# EAGLE board ControlDeck (EAGLE 9.6.2)
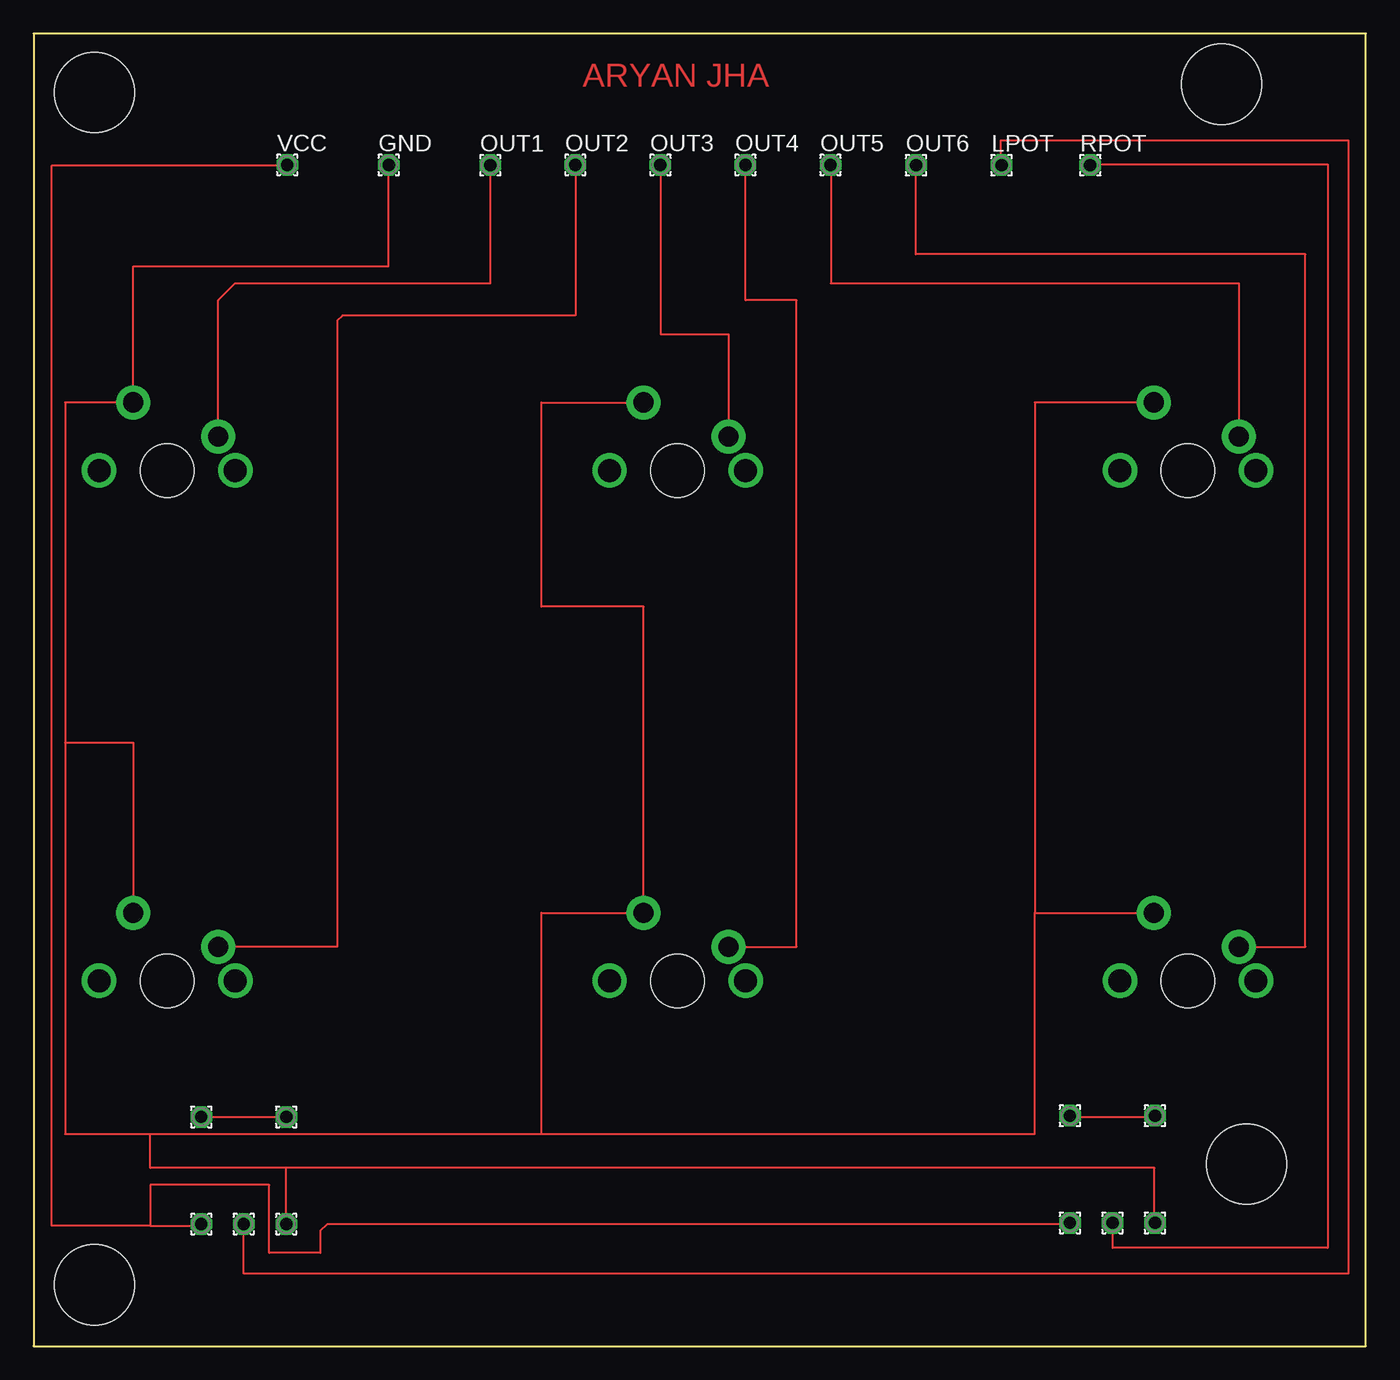
[diagram p0: board, top side]
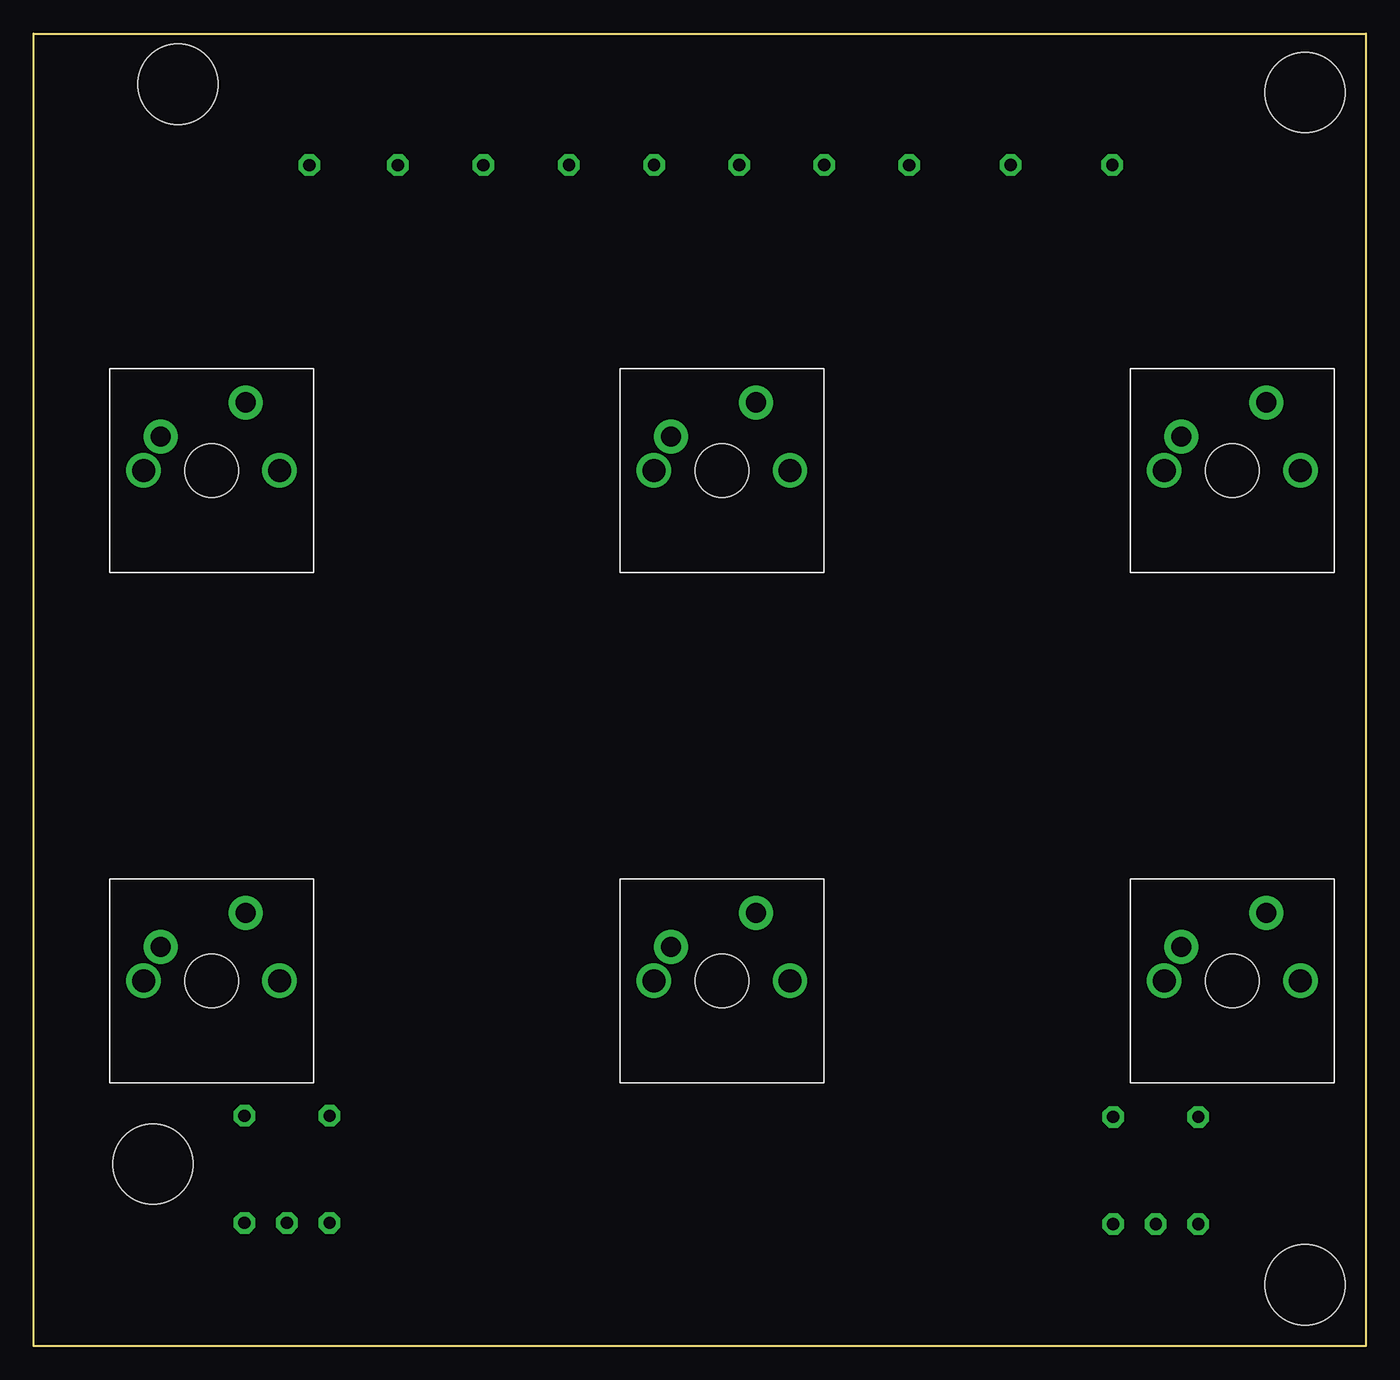
[diagram p1: board, bottom side, seen from below]

Size 99.48 x 98 mm. Coordinates in mm from the lower left corner, seen from the top.
Outline: 0,98 0,0 99.48,0 99.48,98 0,98
Copper layers (1*16): Top 0.035mm / dielectric 1.5mm / Bottom 0.035mm
Design rules "default": minimum track width 6mil, minimum drill 0.35mm, track to track 6mil, track to pad 6mil, pad to pad 6mil, via to via 6mil, smd to smd 6mil, copper to edge 40mil, drill to drill 6mil, minimum pad ring 10mil, minimum via ring 8mil, stop-mask expansion 4mil, vias tented up to drill 0mil, thermal gap 10mil
Holes 6 mm at 88.69,94.21 4.55,93.59 4.55,4.59 90.55,13.59

## Footprints (pad centres in the part's own frame; a part is rotated, then mirrored left to right if it is on the bottom)
CHERRY-MX = drill 1.714 pad 1.93: P$3 -5.08,0; P$4 5.08,0 | drill 1.5 pad 2.54: SW1 -3.81,2.54; SW2 2.54,5.08 | hole 4: 0,0
1,6/0,9 = drill 0.914 pad 1.6 octagon: 1 0,0

## Placement (x,y rotation side)
E$1  [CHERRY-MX]  9.98,65.38 0 bottom
E$2  [CHERRY-MX]  48.08,65.38 0 bottom
E$3  [CHERRY-MX]  86.18,65.38 0 bottom
E$4  [CHERRY-MX]  9.98,27.28 0 bottom
E$5  [CHERRY-MX]  48.08,27.28 0 bottom
E$6  [CHERRY-MX]  86.18,27.28 0 bottom
E$7  [1,6/0,9]  77.38,17.21 0 top
E$8  [1,6/0,9]  83.72,17.21 0 top
E$9  [1,6/0,9]  83.72,9.21 0 top
E$10  [1,6/0,9]  80.55,9.21 0 top
E$11  [1,6/0,9]  77.38,9.21 0 top
E$17  [1,6/0,9]  12.52,17.12 0 top
E$18  [1,6/0,9]  18.87,17.12 0 top
E$19  [1,6/0,9]  18.87,9.12 0 top
E$20  [1,6/0,9]  15.7,9.12 0 top
E$21  [1,6/0,9]  12.52,9.12 0 top
GND  [1,6/0,9]  26.53,88.19 0 top
LPOT  [1,6/0,9]  72.27,88.17 0 top
OUT1  [1,6/0,9]  34.1,88.17 0 top
OUT2  [1,6/0,9]  40.45,88.19 0 top
OUT3  [1,6/0,9]  46.8,88.19 0 top
OUT4  [1,6/0,9]  53.15,88.19 0 top
OUT5  [1,6/0,9]  59.5,88.19 0 top
OUT6  [1,6/0,9]  65.89,88.17 0 top
RPOT  [1,6/0,9]  78.89,88.17 0 top
VCC  [1,6/0,9]  18.94,88.19 0 top

## Library data of the parts
E$1-E$6 = cherrymx
E$7-E$11 E$17-E$21 GND LPOT OUT1-OUT6 RPOT VCC = wirepad

## Nets
S$1: E$1.SW2 E$2.SW2 E$3.SW2 E$4.SW2 E$5.SW2 E$6.SW2
S$2: E$1.SW1
S$3: E$4.SW1
S$4: E$2.SW1
S$5: E$5.SW1
S$6: E$3.SW1
S$7: E$6.SW1

## Tracks (layer width: path | path; a pad name or v marks a point on that pad's centre or on a via)
S$1
  Top 0.152: 2.36,45.06 2.36,70.46 E$1.SW2 7.44,80.62 26.49,80.62 26.49,88.37 | 2.36,45.06 7.44,45.06 E$4.SW2 | 2.36,45.06 2.36,15.85 8.71,15.85 | 8.71,15.85 37.92,15.85 | 37.92,15.85 37.92,32.36 E$5.SW2 45.54,55.22 37.92,55.22 37.92,70.46 E$2.SW2 | 37.92,15.85 74.75,15.85 74.75,32.36 | 74.75,32.36 E$6.SW2 | E$3.SW2 74.75,70.46 74.75,32.36 | 18.87,9.12 18.87,13.31 | 18.87,13.31 8.71,13.31 8.71,15.85 | 83.68,9.41 83.68,13.31 18.87,13.31
S$2
  Top 0.152: E$1.SW1 13.79,78.08 15.06,79.35 34.11,79.35 34.11,88.24
S$3
  Top 0.152: 40.46,88.11 40.46,76.94 23.06,76.94 22.68,76.56 22.68,29.82 E$4.SW1
S$4
  Top 0.152: 46.81,88.24 46.81,75.54 51.89,75.54 E$2.SW1
S$5
  Top 0.152: E$5.SW1 56.97,29.82 56.97,78.08 53.16,78.08 53.16,88.24
S$6
  Top 0.152: 59.51,88.24 59.51,79.35 89.99,79.35 E$3.SW1
S$7
  Top 0.152: E$6.SW1 94.95,29.82 94.95,81.51 65.86,81.51 65.86,87.99
S$8
  Top 0.152: 72.21,88.11 72.21,90.02 98.15,90.02 98.15,5.42 15.7,5.42 15.7,8.99
S$9
  Top 0.152: 78.94,88.24 96.61,88.24 96.61,7.34 80.57,7.34 80.57,9.09
S$11
  Top 0.152: 77.29,17.12 83.64,17.12
S$12
  Top 0.152: 77.29,9.12 21.92,9.12 21.41,8.61 21.41,6.96 17.6,6.96 17.6,12.04 8.71,12.04 8.71,8.99 | 8.71,8.99 1.35,8.99 1.35,88.11 18.75,88.11 18.87,88.24 | 8.71,8.99 12.52,8.99
S$16
  Top 0.152: 12.52,17.12 18.89,17.12

## Text on the board
Top: ARYAN JHA